# Altium PCB mini_backplane.PcbDoc (part 3 of 5)
Units mm, origin at the board's own origin, x right, y up, seen from the top; angles counter-clockwise.
Board outline 232.03 x 195 mm, 5 copper layers (Top Layer, MidLayer1, GND, POWER, Bottom Layer); 241 components, 200 nets, 1637 pads, 676 vias.
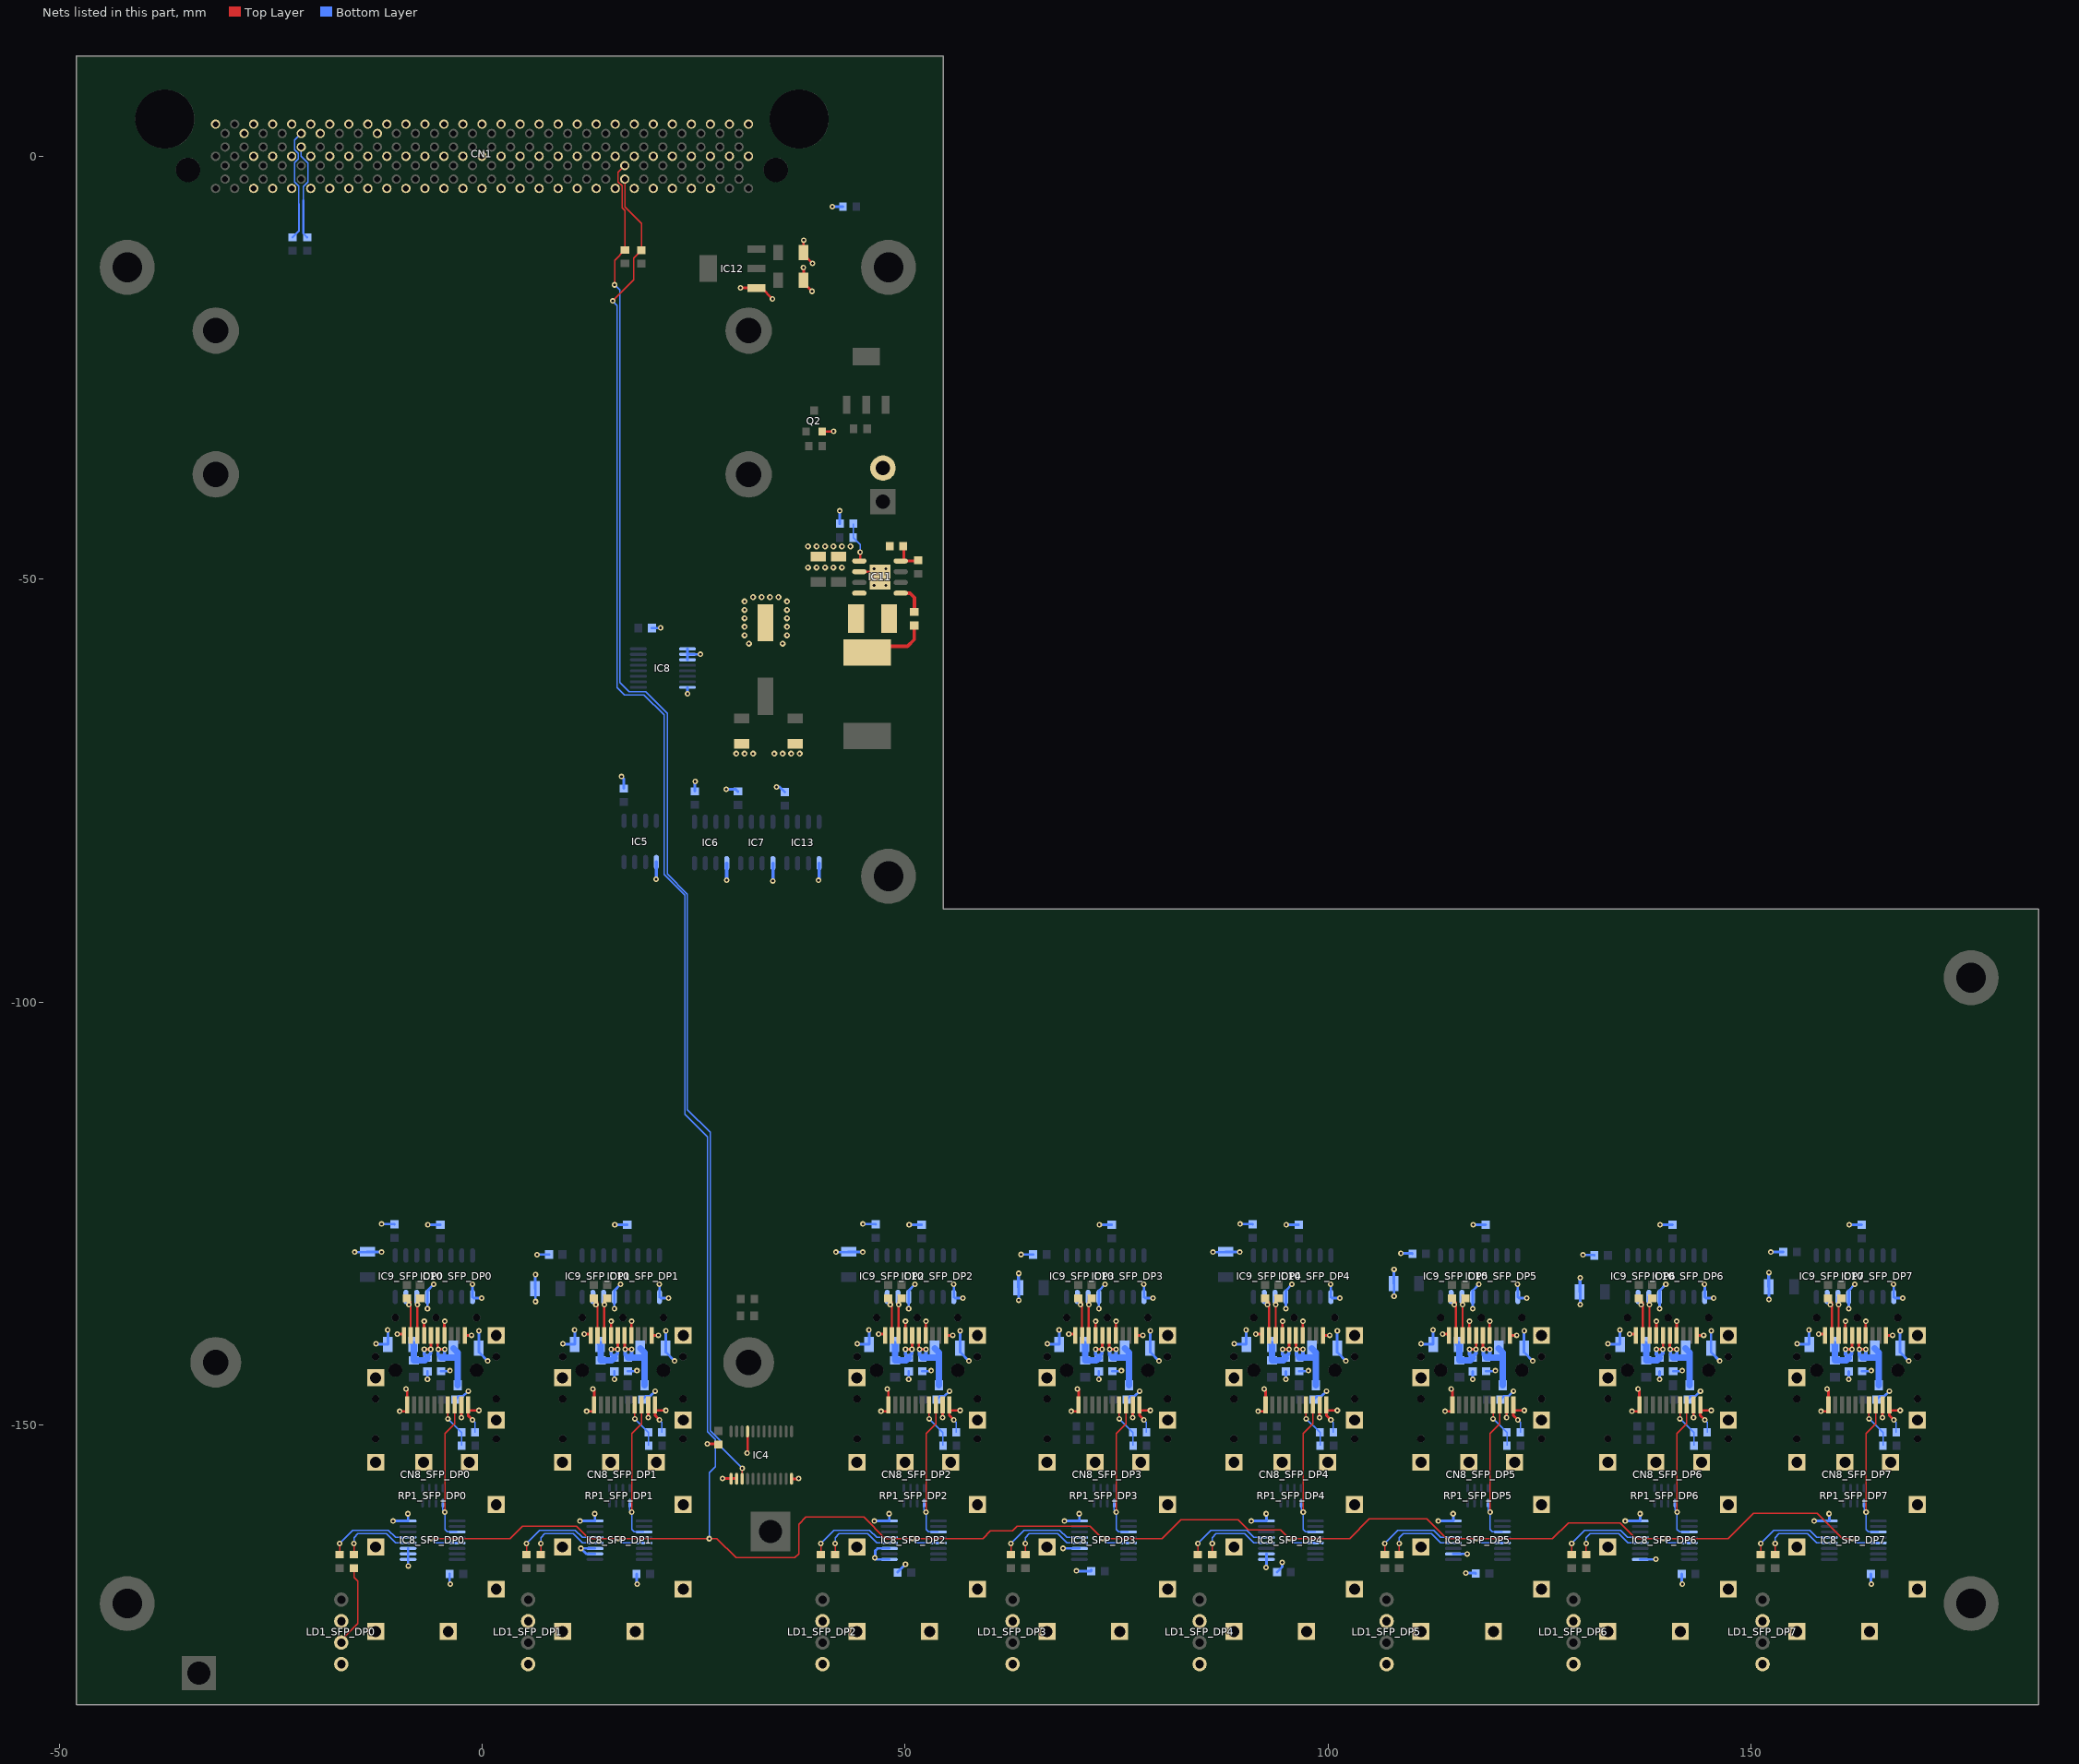
[diagram p5: the nets of this part, all layers, seen from the top]

## Via types
v1: diameter 0.66, hole 0.305, Top Layer to Bottom Layer, tented both sides, 576 vias
v2: diameter 0.711, hole 0.33, Top Layer to Bottom Layer, tented both sides, 97 vias
v3: diameter 0.66, hole 0.305, Top Layer to Bottom Layer, 3 vias

## Nets (pads, with @x,y where several pads share a name; then routed paths per layer and width w, separated by ;. In a path a pad name is that pad's centre, name@x,y a point inside that pad or via, vN(x,y) a via of type N, cw(c..) or ccw(c..) an arc to the next point about the centre after c; other vN are vias at no path point) (continued)
GND: C75.1 C76.1 C77.1 C78.1 C79_SFP_DP0.1 C79_SFP_DP1.1 C79_SFP_DP2.1 C79_SFP_DP3.1 C79_SFP_DP4.1 C79_SFP_DP5.1 C79_SFP_DP6.1 C79_SFP_DP7.1 C80_SFP_DP0.1 C80_SFP_DP1.1 C80_SFP_DP2.1 C80_SFP_DP3.1 C80_SFP_DP4.1 C80_SFP_DP5.1 C80_SFP_DP6.1 C80_SFP_DP7.1 C81_SFP_DP0.1 C81_SFP_DP1.1 C81_SFP_DP2.1 C81_SFP_DP3.1 C81_SFP_DP4.1 C81_SFP_DP5.1 C81_SFP_DP6.1 C81_SFP_DP7.1 C85.2 C86.1 C87.1 C88.1 C89.1 C90.1 C91.1 C92.1 C93.1 C117_SFP_DP0.2 C117_SFP_DP1.2 C117_SFP_DP2.2 C117_SFP_DP3.2 C117_SFP_DP4.2 C117_SFP_DP5.2 C117_SFP_DP6.2 C117_SFP_DP7.2 C118_SFP_DP0.2 C118_SFP_DP1.2 C118_SFP_DP2.2 C118_SFP_DP3.2 C118_SFP_DP4.2 C118_SFP_DP5.2 C118_SFP_DP6.2 C118_SFP_DP7.2 C120_SFP_DP0.1 C120_SFP_DP1.1 C120_SFP_DP2.1 C120_SFP_DP3.1 C120_SFP_DP4.1 C120_SFP_DP5.1 C120_SFP_DP6.1 C120_SFP_DP7.1 C121.1 C121_SFP_DP0.1 C121_SFP_DP1.1 C121_SFP_DP2.1 C121_SFP_DP3.1 C121_SFP_DP4.1 C121_SFP_DP5.1 C121_SFP_DP6.1 C121_SFP_DP7.1 C122_SFP_DP0.1 C122_SFP_DP1.1 C122_SFP_DP2.1 C122_SFP_DP3.1 C122_SFP_DP4.1 C122_SFP_DP5.1 C122_SFP_DP6.1 C122_SFP_DP7.1 C123_SFP_DP0.1 C123_SFP_DP1.1 C123_SFP_DP2.1 C123_SFP_DP3.1 C123_SFP_DP4.1 C123_SFP_DP5.1 C123_SFP_DP6.1 C123_SFP_DP7.1 CN1.1 CN1.5 CN1.7 CN1.10 CN1.13 CN1.16 CN1.17 CN1.19 CN1.22 CN1.25 CN1.26 CN1.28 CN1.31 CN1.34 CN1.37 CN1.40 CN1.43 CN1.46 CN1.49 CN1.52 CN1.55 CN1.58 CN1.61 CN1.64 CN1.67 CN1.70 CN1.73 CN1.76 CN1.79 CN1.82 CN1.85 CN1.86 CN1.89 CN1.92 CN1.92A CN1.95 CN1.95A CN1.98 CN1.98A CN1.101 CN1.101A CN1.104 CN1.104A CN1.107 CN1.107A CN1.110 CN1.110A CN1.113 CN1.113A CN1.116 CN1.116A CN1.119 CN1.119A CN1.122 CN1.122A CN1.125 CN1.125A CN1.128 CN1.128A CN1.131 CN1.131A CN1.134 CN1.134A CN1.137 CN1.137A CN1.140 CN1.140A CN1.143 CN1.143A CN1.146 CN1.146A CN1.149 CN1.149A CN1.152 CN1.152A CN1.155 CN1.155A CN1.158 CN1.158A CN1.161 CN1.161A CN1.164 CN1.164A CN2.2 CN8_SFP_DP0.1 CN8_SFP_DP0.9 CN8_SFP_DP0.10 CN8_SFP_DP0.11 CN8_SFP_DP0.14 CN8_SFP_DP0.17 CN8_SFP_DP0.20 CN8_SFP_DP0.21 CN8_SFP_DP0.22 CN8_SFP_DP0.23 CN8_SFP_DP0.24 CN8_SFP_DP0.25 CN8_SFP_DP0.26 CN8_SFP_DP0.27 CN8_SFP_DP0.28 CN8_SFP_DP0.29 CN8_SFP_DP0.30 CN8_SFP_DP0.31 CN8_SFP_DP1.1 CN8_SFP_DP1.9 CN8_SFP_DP1.10 CN8_SFP_DP1.11 CN8_SFP_DP1.14 CN8_SFP_DP1.17 CN8_SFP_DP1.20 CN8_SFP_DP1.21 CN8_SFP_DP1.22 CN8_SFP_DP1.23 CN8_SFP_DP1.24 CN8_SFP_DP1.25 CN8_SFP_DP1.26 CN8_SFP_DP1.27 CN8_SFP_DP1.28 CN8_SFP_DP1.29 CN8_SFP_DP1.30 CN8_SFP_DP1.31 CN8_SFP_DP2.1 CN8_SFP_DP2.9 CN8_SFP_DP2.10 CN8_SFP_DP2.11 CN8_SFP_DP2.14 CN8_SFP_DP2.17 CN8_SFP_DP2.20 CN8_SFP_DP2.21 CN8_SFP_DP2.22 CN8_SFP_DP2.23 CN8_SFP_DP2.24 CN8_SFP_DP2.25 CN8_SFP_DP2.26 CN8_SFP_DP2.27 CN8_SFP_DP2.28 CN8_SFP_DP2.29 CN8_SFP_DP2.30 CN8_SFP_DP2.31 CN8_SFP_DP3.1 CN8_SFP_DP3.9 CN8_SFP_DP3.10 CN8_SFP_DP3.11 CN8_SFP_DP3.14 CN8_SFP_DP3.17 CN8_SFP_DP3.20 CN8_SFP_DP3.21 CN8_SFP_DP3.22 CN8_SFP_DP3.23 CN8_SFP_DP3.24 CN8_SFP_DP3.25 CN8_SFP_DP3.26 CN8_SFP_DP3.27 CN8_SFP_DP3.28 CN8_SFP_DP3.29 CN8_SFP_DP3.30 CN8_SFP_DP3.31 CN8_SFP_DP4.1 CN8_SFP_DP4.9 CN8_SFP_DP4.10 CN8_SFP_DP4.11 CN8_SFP_DP4.14 CN8_SFP_DP4.17 CN8_SFP_DP4.20 CN8_SFP_DP4.21 CN8_SFP_DP4.22 CN8_SFP_DP4.23 CN8_SFP_DP4.24 CN8_SFP_DP4.25 CN8_SFP_DP4.26 CN8_SFP_DP4.27 CN8_SFP_DP4.28 CN8_SFP_DP4.29 CN8_SFP_DP4.30 CN8_SFP_DP4.31 CN8_SFP_DP5.1 CN8_SFP_DP5.9 CN8_SFP_DP5.10 CN8_SFP_DP5.11 CN8_SFP_DP5.14 CN8_SFP_DP5.17 CN8_SFP_DP5.20 CN8_SFP_DP5.21 CN8_SFP_DP5.22 CN8_SFP_DP5.23 CN8_SFP_DP5.24 CN8_SFP_DP5.25 CN8_SFP_DP5.26 CN8_SFP_DP5.27 CN8_SFP_DP5.28 CN8_SFP_DP5.29 CN8_SFP_DP5.30 CN8_SFP_DP5.31 CN8_SFP_DP6.1 CN8_SFP_DP6.9 CN8_SFP_DP6.10 CN8_SFP_DP6.11 CN8_SFP_DP6.14 CN8_SFP_DP6.17 CN8_SFP_DP6.20 CN8_SFP_DP6.21 CN8_SFP_DP6.22 CN8_SFP_DP6.23 CN8_SFP_DP6.24 CN8_SFP_DP6.25 CN8_SFP_DP6.26 CN8_SFP_DP6.27 CN8_SFP_DP6.28 CN8_SFP_DP6.29 CN8_SFP_DP6.30 CN8_SFP_DP6.31 CN8_SFP_DP7.1 CN8_SFP_DP7.9 CN8_SFP_DP7.10 CN8_SFP_DP7.11 CN8_SFP_DP7.14 CN8_SFP_DP7.17 CN8_SFP_DP7.20 CN8_SFP_DP7.21 CN8_SFP_DP7.22 CN8_SFP_DP7.23 CN8_SFP_DP7.24 CN8_SFP_DP7.25 CN8_SFP_DP7.26 CN8_SFP_DP7.27 CN8_SFP_DP7.28 CN8_SFP_DP7.29 CN8_SFP_DP7.30 CN8_SFP_DP7.31 D1.1 IC4.1 IC4.2 IC4.12 IC4.21 IC5.1 IC6.1 IC7.1 IC8.1 IC8.2 IC8.3 IC8.8 IC8_SFP_DP0.1 IC8_SFP_DP0.2 IC8_SFP_DP0.3 IC8_SFP_DP0.8 IC8_SFP_DP1.2 IC8_SFP_DP1.3 IC8_SFP_DP1.8 IC8_SFP_DP2.1 IC8_SFP_DP2.3 IC8_SFP_DP2.8 IC8_SFP_DP3.3 IC8_SFP_DP3.8 IC8_SFP_DP4.1 IC8_SFP_DP4.2 IC8_SFP_DP4.8 IC8_SFP_DP5.2 IC8_SFP_DP5.8 IC8_SFP_DP6.1 IC8_SFP_DP6.8 IC8_SFP_DP7.8 IC9_SFP_DP0.1 IC9_SFP_DP1.1 IC9_SFP_DP2.1 IC9_SFP_DP3.1 IC9_SFP_DP4.1 IC9_SFP_DP5.1 IC9_SFP_DP6.1 IC9_SFP_DP7.1 IC10_SFP_DP0.1 IC10_SFP_DP1.1 IC10_SFP_DP2.1 IC10_SFP_DP3.1 IC10_SFP_DP4.1 IC10_SFP_DP5.1 IC10_SFP_DP6.1 IC10_SFP_DP7.1 IC11.6 IC11.PAD IC12.1 IC13.1 LD1_SFP_DP0.1 LD1_SFP_DP0.3 LD1_SFP_DP1.1 LD1_SFP_DP1.3 LD1_SFP_DP2.1 LD1_SFP_DP2.3 LD1_SFP_DP3.1 LD1_SFP_DP3.3 LD1_SFP_DP4.1 LD1_SFP_DP4.3 LD1_SFP_DP5.1 LD1_SFP_DP5.3 LD1_SFP_DP6.1 LD1_SFP_DP6.3 LD1_SFP_DP7.1 LD1_SFP_DP7.3 Q2.2 R12.2 R70_SFP_DP0.1 R70_SFP_DP1.1 R70_SFP_DP2.1 R70_SFP_DP3.1 R70_SFP_DP4.1 R70_SFP_DP5.1 R70_SFP_DP6.1 R70_SFP_DP7.1 R77.1 | length 416.9
  Top Layer w0.305: v1(-10.008,-139.283) -9.4,-139.283 CN8_SFP_DP0.20@-9.243,-139.44 ; v1(-9.729,-148.402) -8.916,-148.402 -8.843,-148.33 CN8_SFP_DP0.1@-8.843,-147.64 -8.843,-145.782 -8.865,-145.76 v1(-8.992,-145.76) ; CN8_SFP_DP0.17@-6.843,-139.44 -6.843,-137.77 v1(-6.833,-137.759) ; CN8_SFP_DP0.14@-4.443,-139.44 -4.443,-137.783 v1(-4.42,-137.759) ; v1(-2.443,-149.134) CN8_SFP_DP0.9@-2.443,-147.64 ; CN8_SFP_DP0.11@-2.043,-139.44 -1.274,-139.44 v1(-1.245,-139.41) ; v1(-1.118,-149.418) -1.643,-148.893 CN8_SFP_DP0.10@-1.643,-147.64 -1.643,-148.3 v1(-0.356,-148.3) ; v1(12.09,-139.283) 12.698,-139.283 CN8_SFP_DP1.20@12.855,-139.44 ; v1(12.369,-148.402) 13.182,-148.402 13.255,-148.33 CN8_SFP_DP1.1@13.255,-147.64 13.255,-145.782 13.233,-145.76 v1(13.106,-145.76) ; CN8_SFP_DP1.17@15.255,-139.44 15.255,-137.77 v1(15.265,-137.759) ; CN8_SFP_DP1.14@17.655,-139.44 17.655,-137.783 v1(17.678,-137.759) ; v1(19.655,-149.134) CN8_SFP_DP1.9@19.655,-147.64 ; CN8_SFP_DP1.11@20.055,-139.44 20.824,-139.44 v1(20.853,-139.41) ; v1(20.98,-149.418) 20.455,-148.893 CN8_SFP_DP1.10@20.455,-147.64 20.455,-148.3 v1(21.742,-148.3) ; v1(26.644,-152.263) 27.876,-152.263 C75.1@27.94,-152.326 ; v1(28.448,-156.352) 30.063,-156.352 IC4.2@30.095,-156.384 ; v1(30.556,-15.56) 30.57,-15.574 IC12.1@32.441,-15.574 33.059,-15.574 v1(34.34,-16.855) ; v1(31.343,-153.33) 31.395,-153.278 IC4.21@31.395,-150.784 31.395,-152.008 ; IC4.12@36.595,-156.384 37.408,-156.384 v1(37.439,-156.352) ; v1(37.998,-13.172) 38.025,-13.199 C89.1@38.025,-14.671 38.025,-14.977 v1(39.014,-15.966) ; v1(38.023,-9.921) 37.999,-9.945 C86.1@37.999,-11.369 37.999,-11.599 v1(39.065,-12.664) ; Q2.2@40.218,-32.558 41.523,-32.558 v1(41.554,-32.527) ; IC11.6@44.602,-49.123 46.417,-49.123 IC11.PAD@47.052,-49.758 ; v1(46.888,-139.283) 47.496,-139.283 CN8_SFP_DP2.20@47.653,-139.44 ; v1(47.167,-148.402) 47.98,-148.402 48.053,-148.33 CN8_SFP_DP2.1@48.053,-147.64 48.053,-145.782 48.031,-145.76 v1(47.904,-145.76) ; CN8_SFP_DP2.17@50.053,-139.44 50.053,-137.77 v1(50.063,-137.759) ; CN8_SFP_DP2.14@52.453,-139.44 52.453,-137.783 v1(52.476,-137.759) ; v1(54.453,-149.134) CN8_SFP_DP2.9@54.453,-147.64 ; CN8_SFP_DP2.11@54.853,-139.44 55.622,-139.44 v1(55.651,-139.41) ; v1(55.778,-149.418) 55.253,-148.893 CN8_SFP_DP2.10@55.253,-147.64 55.253,-148.3 v1(56.54,-148.3) ; v1(69.367,-139.283) 69.975,-139.283 CN8_SFP_DP3.20@70.132,-139.44 ; v1(69.646,-148.402) 70.459,-148.402 70.532,-148.33 CN8_SFP_DP3.1@70.532,-147.64 70.532,-145.782 70.51,-145.76 v1(70.383,-145.76) ; CN8_SFP_DP3.17@72.532,-139.44 72.532,-137.77 v1(72.542,-137.759) ; CN8_SFP_DP3.14@74.932,-139.44 74.932,-137.783 v1(74.955,-137.759) ; v1(76.932,-149.134) CN8_SFP_DP3.9@76.932,-147.64 ; CN8_SFP_DP3.11@77.332,-139.44 78.101,-139.44 v1(78.13,-139.41) ; v1(78.257,-149.418) 77.732,-148.893 CN8_SFP_DP3.10@77.732,-147.64 77.732,-148.3 v1(79.019,-148.3) ; v1(91.465,-139.283) 92.073,-139.283 CN8_SFP_DP4.20@92.23,-139.44 ; v1(91.744,-148.402) 92.557,-148.402 92.63,-148.33 CN8_SFP_DP4.1@92.63,-147.64 92.63,-145.782 92.608,-145.76 v1(92.481,-145.76) ; CN8_SFP_DP4.17@94.63,-139.44 94.63,-137.77 v1(94.64,-137.759) ; CN8_SFP_DP4.14@97.03,-139.44 97.03,-137.783 v1(97.053,-137.759) ; v1(99.03,-149.134) CN8_SFP_DP4.9@99.03,-147.64 ; CN8_SFP_DP4.11@99.43,-139.44 100.199,-139.44 v1(100.228,-139.41) ; v1(100.355,-149.418) 99.83,-148.893 CN8_SFP_DP4.10@99.83,-147.64 99.83,-148.3 v1(101.117,-148.3) ; v1(113.563,-139.283) 114.171,-139.283 CN8_SFP_DP5.20@114.328,-139.44 ; v1(113.842,-148.402) 114.655,-148.402 114.728,-148.33 CN8_SFP_DP5.1@114.728,-147.64 114.728,-145.782 114.706,-145.76 v1(114.579,-145.76) ; CN8_SFP_DP5.17@116.728,-139.44 116.728,-137.77 v1(116.738,-137.759) ; CN8_SFP_DP5.14@119.128,-139.44 119.128,-137.783 v1(119.151,-137.759) ; v1(121.128,-149.134) CN8_SFP_DP5.9@121.128,-147.64 ; CN8_SFP_DP5.11@121.528,-139.44 122.297,-139.44 v1(122.326,-139.41) ; v1(122.453,-149.418) 121.928,-148.893 CN8_SFP_DP5.10@121.928,-147.64 121.928,-148.3 v1(123.215,-148.3) ; v1(135.661,-139.283) 136.269,-139.283 CN8_SFP_DP6.20@136.426,-139.44 ; v1(135.94,-148.402) 136.753,-148.402 136.826,-148.33 CN8_SFP_DP6.1@136.826,-147.64 136.826,-145.782 136.804,-145.76 v1(136.677,-145.76) ; CN8_SFP_DP6.17@138.826,-139.44 138.826,-137.77 v1(138.836,-137.759) ; CN8_SFP_DP6.14@141.226,-139.44 141.226,-137.783 v1(141.249,-137.759) ; v1(143.226,-149.134) CN8_SFP_DP6.9@143.226,-147.64 ; CN8_SFP_DP6.11@143.626,-139.44 144.395,-139.44 v1(144.424,-139.41) ; v1(144.551,-149.418) 144.026,-148.893 CN8_SFP_DP6.10@144.026,-147.64 144.026,-148.3 v1(145.313,-148.3) ; v1(158.013,-139.283) 158.621,-139.283 CN8_SFP_DP7.20@158.778,-139.44 ; v1(158.292,-148.402) 159.105,-148.402 159.178,-148.33 CN8_SFP_DP7.1@159.178,-147.64 159.178,-145.782 159.156,-145.76 v1(159.029,-145.76) ; CN8_SFP_DP7.17@161.178,-139.44 161.178,-137.77 v1(161.188,-137.759) ; CN8_SFP_DP7.14@163.578,-139.44 163.578,-137.783 v1(163.601,-137.759) ; v1(165.578,-149.134) CN8_SFP_DP7.9@165.578,-147.64 ; CN8_SFP_DP7.11@165.978,-139.44 166.747,-139.44 v1(166.776,-139.41) ; v1(166.903,-149.418) 166.378,-148.893 CN8_SFP_DP7.10@166.378,-147.64 166.378,-148.3 v1(167.665,-148.3)
  Bottom Layer w0.152: v1(-1.118,-149.418) -0.826,-149.71 R70_SFP_DP0.1@-0.826,-150.891 ; v1(20.98,-149.418) 21.272,-149.71 R70_SFP_DP1.1@21.272,-150.891 ; v1(55.778,-149.418) 56.07,-149.71 R70_SFP_DP2.1@56.07,-150.891 ; v1(78.257,-149.418) 78.549,-149.71 R70_SFP_DP3.1@78.549,-150.891 ; v1(100.355,-149.418) 100.647,-149.71 R70_SFP_DP4.1@100.647,-150.891 ; v1(122.453,-149.418) 122.745,-149.71 R70_SFP_DP5.1@122.745,-150.891 ; v1(144.551,-149.418) 144.843,-149.71 R70_SFP_DP6.1@144.843,-150.891 ; v1(166.903,-149.418) 167.195,-149.71 R70_SFP_DP7.1@167.195,-150.891
  Bottom Layer w0.305: v1(-15.063,-129.581) v1(-11.888,-129.581) -11.94,-129.528 C122_SFP_DP0.1@-13.564,-129.528 ; v1(-12.548,-140.426) -12.497,-140.477 C120_SFP_DP0.1@-11.127,-140.477 -11.127,-138.799 v1(-11.151,-138.775) ; v1(-11.862,-126.253) -10.402,-126.253 C80_SFP_DP0.1@-10.364,-126.291 ; v1(-10.516,-161.381) -10.502,-161.367 IC8_SFP_DP0.8@-8.742,-161.367 -8.742,-160.539 v1(-8.763,-160.518) ; IC8_SFP_DP0.3@-8.742,-164.617 -8.742,-166.66 v3(-8.713,-166.69) ; v1(-6.452,-144.617) C79_SFP_DP0.1@-6.452,-143.69 ; v1(-6.452,-136.261) IC9_SFP_DP0.1@-6.452,-134.875 -6.452,-134.127 v1(-5.715,-133.391) ; v1(-6.401,-126.355) -6.389,-126.342 C81_SFP_DP0.1@-4.928,-126.342 ; C118_SFP_DP0.2@-4.852,-143.665 -3.848,-143.665 v1(-3.785,-143.601) ; C121_SFP_DP0.1@-3.823,-167.63 -3.823,-168.76 v1(-3.76,-168.824) ; C123_SFP_DP0.1@-3.163,-147.03 -2.782,-146.649 -2.261,-146.649 v1(-1.626,-146.014) ; v1(-1.143,-133.391) -1.118,-133.416 IC10_SFP_DP0.1@-1.118,-134.875 -0.977,-135.016 v1(-0.051,-135.016) ; v1(-0.356,-138.902) -0.483,-138.902 -0.38,-139.005 C117_SFP_DP0.2@-0.38,-140.96 -0.38,-141.418 v1(0.66,-142.458) ; C122_SFP_DP1.1@6.272,-133.924 6.272,-132.3 v1(6.324,-132.248) v1(6.324,-135.423) ; v1(6.502,-129.885) 6.527,-129.86 C80_SFP_DP1.1@7.912,-129.86 ; v1(9.55,-140.426) 9.601,-140.477 C120_SFP_DP1.1@10.971,-140.477 10.971,-138.799 v1(10.947,-138.775) ; v1(11.582,-161.381) 11.596,-161.367 IC8_SFP_DP1.8@13.356,-161.367 13.356,-160.539 v1(13.335,-160.518) ; v3(11.684,-164.607) v3@11.693,-164.617 ; IC8_SFP_DP1.2@13.356,-165.267 12.343,-165.267 v3@11.693,-164.617 ; IC8_SFP_DP1.3@13.356,-164.617 v3@11.693,-164.617 ; v1(15.646,-144.617) C79_SFP_DP1.1@15.646,-143.69 ; v1(15.646,-136.261) IC9_SFP_DP1.1@15.646,-134.875 15.646,-134.127 v1(16.383,-133.391) ; v1(15.697,-126.355) 15.709,-126.342 C81_SFP_DP1.1@17.17,-126.342 ; v1(16.484,-73.345) 16.764,-73.624 C77.1@16.764,-74.755 ; C118_SFP_DP1.2@17.246,-143.665 18.25,-143.665 v1(18.313,-143.601) ; C121_SFP_DP1.1@18.275,-167.63 18.275,-168.76 v1(18.338,-168.824) ; C123_SFP_DP1.1@18.935,-147.03 19.316,-146.649 19.837,-146.649 v1(20.472,-146.014) ; C121.1@20.078,-55.794 21.082,-55.794 v1(21.107,-55.768) ; v1(20.955,-133.391) 20.98,-133.416 IC10_SFP_DP1.1@20.98,-134.875 21.121,-135.016 v1(22.047,-135.016) ; v1(21.742,-138.902) 21.615,-138.902 21.718,-139.005 C117_SFP_DP1.2@21.718,-140.96 21.718,-141.418 v1(22.758,-142.458) ; IC8.8@24.286,-62.793 24.286,-63.545 v1(24.307,-63.566) ; IC8.3@24.286,-59.543 IC8.2@24.286,-58.893 ; IC8.1@24.286,-58.243 IC8.2@24.286,-58.893 ; C90.1@25.171,-75.085 25.171,-73.955 v1(25.196,-73.929) ; v1(25.806,-58.892) IC8.2@24.286,-58.893 ; v1(28.854,-74.844) 29.984,-74.844 C76.1@30.251,-75.11 ; v1(34.823,-74.564) 35.166,-74.564 C78.1@35.788,-75.187 ; v1(41.402,-5.959) R12.2@42.659,-5.959 ; v1(41.833,-129.581) v1(45.008,-129.581) 44.956,-129.528 C122_SFP_DP2.1@43.332,-129.528 ; v1(42.291,-41.925) 42.303,-41.938 C91.1@42.303,-43.449 ; v1(44.348,-140.426) 44.399,-140.477 C120_SFP_DP2.1@45.769,-140.477 45.769,-138.799 v1(45.745,-138.775) ; v1(45.034,-126.253) 46.494,-126.253 C80_SFP_DP2.1@46.532,-126.291 ; v1(46.38,-161.381) 46.394,-161.367 IC8_SFP_DP2.8@48.154,-161.367 48.154,-160.539 v1(48.133,-160.518) ; IC8_SFP_DP2.1@48.154,-165.917 46.623,-165.917 v1(46.431,-165.725) 46.482,-165.674 46.482,-164.887 46.751,-164.617 IC8_SFP_DP2.3@48.154,-164.617 ; C121_SFP_DP2.1@49.136,-167.414 v1(50.063,-166.487) ; v1(50.444,-144.617) C79_SFP_DP2.1@50.444,-143.69 ; v1(50.444,-136.261) IC9_SFP_DP2.1@50.444,-134.875 50.444,-134.127 v1(51.181,-133.391) ; v1(50.495,-126.355) 50.507,-126.342 C81_SFP_DP2.1@51.968,-126.342 ; C118_SFP_DP2.2@52.044,-143.665 53.048,-143.665 v1(53.111,-143.601) ; C123_SFP_DP2.1@53.733,-147.03 54.114,-146.649 54.635,-146.649 v1(55.27,-146.014) ; v1(55.753,-133.391) 55.778,-133.416 IC10_SFP_DP2.1@55.778,-134.875 55.919,-135.016 v1(56.845,-135.016) ; v1(56.54,-138.902) 56.413,-138.902 56.516,-139.005 C117_SFP_DP2.2@56.516,-140.96 56.516,-141.418 v1(57.556,-142.458) ; C122_SFP_DP3.1@63.397,-133.772 63.397,-132.147 v1(63.449,-132.095) v1(63.449,-135.27) ; v1(63.728,-129.86) C80_SFP_DP3.1@65.138,-129.86 ; v1(66.827,-140.426) 66.878,-140.477 C120_SFP_DP3.1@68.248,-140.477 68.248,-138.799 v1(68.224,-138.775) ; v1(68.681,-164.607) 70.623,-164.607 IC8_SFP_DP3.3@70.633,-164.617 ; v1(68.859,-161.381) 68.873,-161.367 IC8_SFP_DP3.8@70.633,-161.367 70.633,-160.539 v1(70.612,-160.518) ; v1(70.256,-167.274) 70.281,-167.3 C121_SFP_DP3.1@72.021,-167.3 C121_SFP_DP3.1@72.021,-167.134 ; v1(72.923,-144.617) C79_SFP_DP3.1@72.923,-143.69 ; v1(72.923,-136.261) IC9_SFP_DP3.1@72.923,-134.875 72.923,-134.127 v1(73.66,-133.391) ; v1(72.974,-126.355) 72.986,-126.342 C81_SFP_DP3.1@74.447,-126.342 ; C118_SFP_DP3.2@74.523,-143.665 75.527,-143.665 v1(75.59,-143.601) ; C123_SFP_DP3.1@76.212,-147.03 76.593,-146.649 77.114,-146.649 v1(77.749,-146.014) ; v1(78.232,-133.391) 78.257,-133.416 IC10_SFP_DP3.1@78.257,-134.875 78.398,-135.016 v1(79.324,-135.016) ; v1(79.019,-138.902) 78.892,-138.902 78.995,-139.005 C117_SFP_DP3.2@78.995,-140.96 78.995,-141.418 v1(80.035,-142.458) ; v1(86.41,-129.581) v1(89.585,-129.581) 89.533,-129.528 C122_SFP_DP4.1@87.909,-129.528 ; v1(88.925,-140.426) 88.976,-140.477 C120_SFP_DP4.1@90.346,-140.477 90.346,-138.799 v1(90.322,-138.775) ; v1(89.611,-126.253) 91.071,-126.253 C80_SFP_DP4.1@91.109,-126.291 ; v1(90.957,-161.381) 90.971,-161.367 IC8_SFP_DP4.8@92.731,-161.367 92.731,-160.539 v1(92.71,-160.518) ; v1(92.684,-166.868) 92.731,-166.821 IC8_SFP_DP4.1@92.731,-165.917 IC8_SFP_DP4.2@92.731,-165.267 ; C121_SFP_DP4.1@93.992,-167.401 94.589,-166.804 v1(94.589,-166.284) ; v1(95.021,-144.617) C79_SFP_DP4.1@95.021,-143.69 ; v1(95.021,-136.261) IC9_SFP_DP4.1@95.021,-134.875 95.021,-134.127 v1(95.758,-133.391) ; v1(95.072,-126.355) 95.084,-126.342 C81_SFP_DP4.1@96.545,-126.342 ; C118_SFP_DP4.2@96.621,-143.665 97.625,-143.665 v1(97.688,-143.601) ; C123_SFP_DP4.1@98.31,-147.03 98.691,-146.649 99.212,-146.649 v1(99.847,-146.014) ; v1(100.33,-133.391) 100.355,-133.416 IC10_SFP_DP4.1@100.355,-134.875 100.496,-135.016 v1(101.422,-135.016) ; v1(101.117,-138.902) 100.99,-138.902 101.093,-139.005 C117_SFP_DP4.2@101.093,-140.96 101.093,-141.418 v1(102.133,-142.458) ; C122_SFP_DP5.1@107.77,-133.289 107.77,-131.665 v1(107.823,-131.613) v1(107.823,-134.788) ; v1(108.635,-129.733) 109.944,-129.733 C80_SFP_DP5.1@109.994,-129.784 ; v1(111.023,-140.426) 111.074,-140.477 C120_SFP_DP5.1@112.444,-140.477 112.444,-138.799 v1(112.42,-138.775) ; v1(113.055,-161.381) 113.069,-161.367 IC8_SFP_DP5.8@114.829,-161.367 114.829,-160.539 v1(114.808,-160.518) ; IC8_SFP_DP5.2@114.829,-165.267 v1(116.484,-165.268) ; v1(116.306,-167.528) 117.437,-167.528 C121_SFP_DP5.1@117.487,-167.579 ; v1(117.119,-144.617) C79_SFP_DP5.1@117.119,-143.69 ; v1(117.119,-136.261) IC9_SFP_DP5.1@117.119,-134.875 117.119,-134.127 v1(117.856,-133.391) ; v1(117.17,-126.355) 117.182,-126.342 C81_SFP_DP5.1@118.643,-126.342 ; C118_SFP_DP5.2@118.719,-143.665 119.723,-143.665 v1(119.786,-143.601) ; C123_SFP_DP5.1@120.408,-147.03 120.789,-146.649 121.31,-146.649 v1(121.945,-146.014) ; v1(122.428,-133.391) 122.453,-133.416 IC10_SFP_DP5.1@122.453,-134.875 122.594,-135.016 v1(123.52,-135.016) ; v1(123.215,-138.902) 123.088,-138.902 123.191,-139.005 C117_SFP_DP5.2@123.191,-140.96 123.191,-141.418 v1(124.231,-142.458) ; C122_SFP_DP6.1@129.767,-134.28 129.767,-132.655 v1(129.819,-132.603) v1(129.819,-135.778) ; v1(130.149,-129.911) 131.457,-129.911 C80_SFP_DP6.1@131.508,-129.962 ; v1(133.121,-140.426) 133.172,-140.477 C120_SFP_DP6.1@134.542,-140.477 134.542,-138.799 v1(134.518,-138.775) ; v1(135.153,-161.381) 135.167,-161.367 IC8_SFP_DP6.8@136.927,-161.367 136.927,-160.539 v1(136.906,-160.518) ; IC8_SFP_DP6.1@136.927,-165.917 138.771,-165.917 v1(138.785,-165.903) ; v1(139.217,-144.617) C79_SFP_DP6.1@139.217,-143.69 ; v1(139.217,-136.261) IC9_SFP_DP6.1@139.217,-134.875 139.217,-134.127 v1(139.954,-133.391) ; v1(139.268,-126.355) 139.28,-126.342 C81_SFP_DP6.1@140.741,-126.342 ; C118_SFP_DP6.2@140.817,-143.665 141.821,-143.665 v1(141.884,-143.601) ; C121_SFP_DP6.1@141.846,-167.63 141.846,-168.76 v1(141.909,-168.824) ; C123_SFP_DP6.1@142.506,-147.03 142.887,-146.649 143.408,-146.649 v1(144.043,-146.014) ; v1(144.526,-133.391) 144.551,-133.416 IC10_SFP_DP6.1@144.551,-134.875 144.692,-135.016 v1(145.618,-135.016) ; v1(145.313,-138.902) 145.186,-138.902 145.289,-139.005 C117_SFP_DP6.2@145.289,-140.96 145.289,-141.418 v1(146.329,-142.458) ; C122_SFP_DP7.1@152.093,-133.67 152.093,-132.046 v1(152.146,-131.994) v1(152.146,-135.169) ; v1(152.349,-129.581) 152.374,-129.555 C80_SFP_DP7.1@153.835,-129.555 ; v1(155.473,-140.426) 155.524,-140.477 C120_SFP_DP7.1@156.894,-140.477 156.894,-138.799 v1(156.87,-138.775) ; v1(157.505,-161.381) 157.519,-161.367 IC8_SFP_DP7.8@159.279,-161.367 159.279,-160.539 v1(159.258,-160.518) ; v1(161.569,-144.617) C79_SFP_DP7.1@161.569,-143.69 ; v1(161.569,-136.261) IC9_SFP_DP7.1@161.569,-134.875 161.569,-134.127 v1(162.306,-133.391) ; v1(161.62,-126.355) 161.632,-126.342 C81_SFP_DP7.1@163.093,-126.342 ; C118_SFP_DP7.2@163.169,-143.665 164.173,-143.665 v1(164.236,-143.601) ; C121_SFP_DP7.1@164.198,-167.63 164.198,-168.76 v1(164.261,-168.824) ; C123_SFP_DP7.1@164.858,-147.03 165.239,-146.649 165.76,-146.649 v1(166.395,-146.014) ; v1(166.878,-133.391) 166.903,-133.416 IC10_SFP_DP7.1@166.903,-134.875 167.044,-135.016 v1(167.97,-135.016) ; v1(167.665,-138.902) 167.538,-138.902 167.641,-139.005 C117_SFP_DP7.2@167.641,-140.96 167.641,-141.418 v1(168.681,-142.458)
  Bottom Layer w0.406: v1(20.574,-85.486) 20.599,-85.461 IC5.1@20.599,-83.466 ; v1(28.93,-85.588) IC6.1@28.93,-83.593 ; v1(34.391,-85.689) IC7.1@34.391,-83.593 ; v1(39.776,-85.613) 39.852,-85.537 IC13.1@39.852,-83.593
  other v2: 30.048,-70.633 31.048,-70.633 32.048,-70.633 34.548,-70.633 35.548,-70.633 36.548,-70.633 37.548,-70.633 31.548,-57.633 35.548,-57.633 31.048,-56.633 36.048,-56.633 31.048,-55.633 36.048,-55.633 31.048,-54.633 36.048,-54.633 31.048,-53.633 36.048,-53.633 31.048,-52.633 36.048,-52.633 32.048,-52.133 33.048,-52.133 34.048,-52.133 35.048,-52.133 46.352,-50.758 47.752,-50.758 46.352,-48.758 47.752,-48.758 38.548,-48.633 39.548,-48.633 40.548,-48.633 41.548,-48.633 42.548,-48.633 38.548,-46.133 39.548,-46.133 40.548,-46.133 41.548,-46.133 42.548,-46.133 43.548,-46.133
I2C_IRQ: CN1.105 IC8_SFP_DP0.13 IC8_SFP_DP1.13 IC8_SFP_DP2.13 IC8_SFP_DP3.13 IC8_SFP_DP4.13 IC8_SFP_DP5.13 IC8_SFP_DP6.13 IC8_SFP_DP7.13 R1.1 | length 380.9
  Top Layer w0.152: v1(-6.02,-163.464) 3.327,-163.464 4.8,-161.991 11.176,-161.991 12.649,-163.464 v1(16.078,-163.464) v1(26.873,-163.464) 27.762,-163.464 30.022,-165.725 36.982,-165.725 37.465,-165.242 37.465,-161.762 38.303,-160.924 45.133,-160.924 47.673,-163.464 v1(50.876,-163.464) 59.207,-163.464 60.121,-162.55 62.712,-162.55 63.271,-161.991 71.882,-161.991 v1(73.355,-163.464) 80.391,-163.464 82.651,-161.204 89.382,-161.204 90.601,-162.423 94.411,-162.423 v1(95.453,-163.464) 102.565,-163.464 104.902,-161.127 111.709,-161.127 114.046,-163.464 v1(117.551,-163.464) 126.542,-163.464 128.422,-161.585 134.566,-161.585 136.42,-163.439 139.623,-163.439 v1(139.649,-163.464) 147.294,-163.464 150.317,-160.442 157.835,-160.442 160.858,-163.464 v1(162.001,-163.464) ; v1(15.443,-17.109) 17.932,-14.62 17.932,-12.017 R1.1@18.846,-11.102 18.846,-7.94 18.465,-7.559 ; CN1.105@16.875,-2.7 16.875,-5.968 18.465,-7.559 ; 18.516,-7.61 18.465,-7.559
  Bottom Layer w0.152: v1(-6.02,-163.464) -5.517,-163.967 IC8_SFP_DP0.13@-2.942,-163.967 ; v1(15.443,-17.109) 15.976,-17.643 15.976,-18.532 ; 15.976,-18.075 15.976,-18.532 ; v1(16.078,-163.464) 16.581,-163.967 IC8_SFP_DP1.13@19.156,-163.967 ; v1(26.873,-163.464) 26.873,-155.666 27.609,-154.93 27.609,-151.754 26.67,-150.814 26.67,-115.966 23.982,-113.279 23.982,-87.371 21.513,-84.902 21.513,-66.055 19.151,-63.693 16.84,-63.693 15.976,-62.829 15.976,-18.532 ; v1(50.876,-163.464) 51.379,-163.967 IC8_SFP_DP2.13@53.954,-163.967 ; v1(73.355,-163.464) 73.858,-163.967 IC8_SFP_DP3.13@76.433,-163.967 ; v1(95.453,-163.464) 95.956,-163.967 IC8_SFP_DP4.13@98.531,-163.967 ; v1(117.551,-163.464) 118.054,-163.967 IC8_SFP_DP5.13@120.629,-163.967 ; v1(139.649,-163.464) 140.152,-163.967 IC8_SFP_DP6.13@142.727,-163.967 ; v1(162.001,-163.464) 162.504,-163.967 IC8_SFP_DP7.13@165.079,-163.967
I2C_NRST: CN1.106 IC4.3 R2.1 | length 164.2
  Top Layer w0.152: v1(15.671,-15.204) 15.671,-12.296 R2.1@16.891,-11.077 16.891,-6.415 16.57,-6.094 16.57,-3.496 16.096,-3.022 16.096,-1.878 CN1.106@16.875,-1.1 ; IC4.3@30.745,-156.384 30.745,-155.147 v1(30.759,-155.133)
  Bottom Layer w0.152: v1(15.671,-15.204) 16.281,-15.814 16.281,-18.583 ; 16.281,-18.202 16.281,-18.583 ; v1(30.759,-155.133) 28.244,-152.618 28.244,-151.958 26.974,-150.688 26.974,-115.433 24.287,-112.745 24.287,-87.244 21.92,-84.877 21.92,-65.903 19.329,-63.312 17.373,-63.312 16.281,-62.22 16.281,-18.583
LED_LINK_SFP_DP0: IC8_SFP_DP0.4 R9_SFP_DP0.1 | length 9.1
  Top Layer w0.152: R9_SFP_DP0.1@-15.139,-165.357 v1(-15.139,-164.023)
  Bottom Layer w0.152: v1(-15.139,-164.023) -15.139,-163.337 -14.682,-162.88 -11.303,-162.88 -10.211,-163.972 -8.748,-163.972 IC8_SFP_DP0.4@-8.742,-163.967
LED_LINK_SFP_DP1: IC8_SFP_DP1.4 R9_SFP_DP1.1 | length 9.1
  Top Layer w0.152: R9_SFP_DP1.1@6.959,-165.357 v1(6.959,-164.023)
  Bottom Layer w0.152: v1(6.959,-164.023) 6.959,-163.337 7.416,-162.88 10.795,-162.88 11.887,-163.972 13.35,-163.972 IC8_SFP_DP1.4@13.356,-163.967
LED_LINK_SFP_DP2: IC8_SFP_DP2.4 R9_SFP_DP2.1 | length 9.1
  Top Layer w0.152: R9_SFP_DP2.1@41.757,-165.357 v1(41.757,-164.023)
  Bottom Layer w0.152: v1(41.757,-164.023) 41.757,-163.337 42.214,-162.88 45.593,-162.88 46.685,-163.972 48.148,-163.972 IC8_SFP_DP2.4@48.154,-163.967
LED_LINK_SFP_DP3: IC8_SFP_DP3.4 R9_SFP_DP3.1 | length 9.1
  Top Layer w0.152: R9_SFP_DP3.1@64.236,-165.357 v1(64.236,-164.023)
  Bottom Layer w0.152: v1(64.236,-164.023) 64.236,-163.337 64.693,-162.88 68.072,-162.88 69.164,-163.972 70.627,-163.972 IC8_SFP_DP3.4@70.633,-163.967
LED_LINK_SFP_DP4: IC8_SFP_DP4.4 R9_SFP_DP4.1 | length 9.1
  Top Layer w0.152: R9_SFP_DP4.1@86.334,-165.357 v1(86.334,-164.023)
  Bottom Layer w0.152: v1(86.334,-164.023) 86.334,-163.337 86.791,-162.88 90.17,-162.88 91.262,-163.972 92.725,-163.972 IC8_SFP_DP4.4@92.731,-163.967
LED_LINK_SFP_DP5: IC8_SFP_DP5.4 R9_SFP_DP5.1 | length 9.1
  Top Layer w0.152: R9_SFP_DP5.1@108.432,-165.357 v1(108.432,-164.023)
  Bottom Layer w0.152: v1(108.432,-164.023) 108.432,-163.337 108.889,-162.88 112.268,-162.88 113.36,-163.972 114.823,-163.972 IC8_SFP_DP5.4@114.829,-163.967
LED_LINK_SFP_DP6: IC8_SFP_DP6.4 R9_SFP_DP6.1 | length 9.1
  Top Layer w0.152: R9_SFP_DP6.1@130.53,-165.357 v1(130.53,-164.023)
  Bottom Layer w0.152: v1(130.53,-164.023) 130.53,-163.337 130.987,-162.88 134.366,-162.88 135.458,-163.972 136.921,-163.972 IC8_SFP_DP6.4@136.927,-163.967
LED_LINK_SFP_DP7: IC8_SFP_DP7.4 R9_SFP_DP7.1 | length 9.1
  Top Layer w0.152: R9_SFP_DP7.1@152.882,-165.357 v1(152.882,-164.023)
  Bottom Layer w0.152: v1(152.882,-164.023) 152.882,-163.337 153.339,-162.88 156.718,-162.88 157.81,-163.972 159.273,-163.972 IC8_SFP_DP7.4@159.279,-163.967
LED_STAT_SFP_DP0: IC8_SFP_DP0.5 R10_SFP_DP0.1 | length 10.4
  Top Layer w0.152: R10_SFP_DP0.1@-16.841,-165.357 v1(-16.841,-164.023)
  Bottom Layer w0.152: v1(-16.841,-164.023) -15.291,-162.474 -11.075,-162.474 -10.237,-163.312 -8.748,-163.312 IC8_SFP_DP0.5@-8.742,-163.317
LED_STAT_SFP_DP1: IC8_SFP_DP1.5 R10_SFP_DP1.1 | length 10.4
  Top Layer w0.152: R10_SFP_DP1.1@5.257,-165.357 v1(5.257,-164.023)
  Bottom Layer w0.152: v1(5.257,-164.023) 6.807,-162.474 11.023,-162.474 11.861,-163.312 13.35,-163.312 IC8_SFP_DP1.5@13.356,-163.317
LED_STAT_SFP_DP2: IC8_SFP_DP2.5 R10_SFP_DP2.1 | length 10.4
  Top Layer w0.152: R10_SFP_DP2.1@40.055,-165.357 v1(40.055,-164.023)
  Bottom Layer w0.152: v1(40.055,-164.023) 41.605,-162.474 45.821,-162.474 46.659,-163.312 48.148,-163.312 IC8_SFP_DP2.5@48.154,-163.317
LED_STAT_SFP_DP3: IC8_SFP_DP3.5 R10_SFP_DP3.1 | length 10.4
  Top Layer w0.152: R10_SFP_DP3.1@62.534,-165.357 v1(62.534,-164.023)
  Bottom Layer w0.152: v1(62.534,-164.023) 64.084,-162.474 68.3,-162.474 69.138,-163.312 70.627,-163.312 IC8_SFP_DP3.5@70.633,-163.317
LED_STAT_SFP_DP4: IC8_SFP_DP4.5 R10_SFP_DP4.1 | length 10.4
  Top Layer w0.152: R10_SFP_DP4.1@84.632,-165.357 v1(84.632,-164.023)
  Bottom Layer w0.152: v1(84.632,-164.023) 86.182,-162.474 90.398,-162.474 91.236,-163.312 92.725,-163.312 IC8_SFP_DP4.5@92.731,-163.317
LED_STAT_SFP_DP5: IC8_SFP_DP5.5 R10_SFP_DP5.1 | length 10.4
  Top Layer w0.152: R10_SFP_DP5.1@106.73,-165.357 v1(106.73,-164.023)
  Bottom Layer w0.152: v1(106.73,-164.023) 108.28,-162.474 112.496,-162.474 113.334,-163.312 114.823,-163.312 IC8_SFP_DP5.5@114.829,-163.317
LED_STAT_SFP_DP6: IC8_SFP_DP6.5 R10_SFP_DP6.1 | length 10.4
  Top Layer w0.152: R10_SFP_DP6.1@128.828,-165.357 v1(128.828,-164.023)
  Bottom Layer w0.152: v1(128.828,-164.023) 130.378,-162.474 134.594,-162.474 135.432,-163.312 136.921,-163.312 IC8_SFP_DP6.5@136.927,-163.317
LED_STAT_SFP_DP7: IC8_SFP_DP7.5 R10_SFP_DP7.1 | length 10.4
  Top Layer w0.152: R10_SFP_DP7.1@151.18,-165.357 v1(151.18,-164.023)
  Bottom Layer w0.152: v1(151.18,-164.023) 152.73,-162.474 156.946,-162.474 157.784,-163.312 159.273,-163.312 IC8_SFP_DP7.5@159.279,-163.317
LOS_SFP_DP0: CN8_SFP_DP0.8 IC8_SFP_DP0.11 RP1_SFP_DP0.5 | length 18
  Top Layer w0.152: v1(-4.395,-160.34) -4.395,-151.044 -3.243,-149.892 CN8_SFP_DP0.8@-3.243,-147.64
  Bottom Layer w0.152: RP1_SFP_DP0.5@-4.636,-159.273 -4.636,-160.098 v1(-4.395,-160.34) -4.395,-162.377 -4.105,-162.667 IC8_SFP_DP0.11@-2.942,-162.667
LOS_SFP_DP1: CN8_SFP_DP1.8 IC8_SFP_DP1.11 RP1_SFP_DP1.5 | length 18
  Top Layer w0.152: v1(17.703,-160.34) 17.703,-151.044 18.855,-149.892 CN8_SFP_DP1.8@18.855,-147.64
  Bottom Layer w0.152: RP1_SFP_DP1.5@17.462,-159.273 17.462,-160.098 v1(17.703,-160.34) 17.703,-162.377 17.993,-162.667 IC8_SFP_DP1.11@19.156,-162.667
LOS_SFP_DP2: CN8_SFP_DP2.8 IC8_SFP_DP2.11 RP1_SFP_DP2.5 | length 18
  Top Layer w0.152: v1(52.501,-160.34) 52.501,-151.044 53.653,-149.892 CN8_SFP_DP2.8@53.653,-147.64
  Bottom Layer w0.152: RP1_SFP_DP2.5@52.26,-159.273 52.26,-160.098 v1(52.501,-160.34) 52.501,-162.377 52.791,-162.667 IC8_SFP_DP2.11@53.954,-162.667
LOS_SFP_DP3: CN8_SFP_DP3.8 IC8_SFP_DP3.11 RP1_SFP_DP3.5 | length 18
  Top Layer w0.152: v1(74.98,-160.34) 74.98,-151.044 76.132,-149.892 CN8_SFP_DP3.8@76.132,-147.64
  Bottom Layer w0.152: RP1_SFP_DP3.5@74.739,-159.273 74.739,-160.098 v1(74.98,-160.34) 74.98,-162.377 75.27,-162.667 IC8_SFP_DP3.11@76.433,-162.667
LOS_SFP_DP4: CN8_SFP_DP4.8 IC8_SFP_DP4.11 RP1_SFP_DP4.5 | length 18
  Top Layer w0.152: v1(97.078,-160.34) 97.078,-151.044 98.23,-149.892 CN8_SFP_DP4.8@98.23,-147.64
  Bottom Layer w0.152: RP1_SFP_DP4.5@96.837,-159.273 96.837,-160.098 v1(97.078,-160.34) 97.078,-162.377 97.368,-162.667 IC8_SFP_DP4.11@98.531,-162.667
LOS_SFP_DP5: CN8_SFP_DP5.8 IC8_SFP_DP5.11 RP1_SFP_DP5.5 | length 18
  Top Layer w0.152: v1(119.176,-160.34) 119.176,-151.044 120.328,-149.892 CN8_SFP_DP5.8@120.328,-147.64
  Bottom Layer w0.152: RP1_SFP_DP5.5@118.935,-159.273 118.935,-160.098 v1(119.176,-160.34) 119.176,-162.377 119.466,-162.667 IC8_SFP_DP5.11@120.629,-162.667
LOS_SFP_DP6: CN8_SFP_DP6.8 IC8_SFP_DP6.11 RP1_SFP_DP6.5 | length 18
  Top Layer w0.152: v1(141.274,-160.34) 141.274,-151.044 142.426,-149.892 CN8_SFP_DP6.8@142.426,-147.64
  Bottom Layer w0.152: RP1_SFP_DP6.5@141.033,-159.273 141.033,-160.098 v1(141.274,-160.34) 141.274,-162.377 141.564,-162.667 IC8_SFP_DP6.11@142.727,-162.667
LOS_SFP_DP7: CN8_SFP_DP7.8 IC8_SFP_DP7.11 RP1_SFP_DP7.5 | length 18
  Top Layer w0.152: v1(163.626,-160.34) 163.626,-151.044 164.778,-149.892 CN8_SFP_DP7.8@164.778,-147.64
  Bottom Layer w0.152: RP1_SFP_DP7.5@163.385,-159.273 163.385,-160.098 v1(163.626,-160.34) 163.626,-162.377 163.916,-162.667 IC8_SFP_DP7.11@165.079,-162.667
NetC46_2: C46.2 CN1.14 | length 13.5
  Bottom Layer w0.152: -21.645,-5.629 -21.645,-3.549 -22.154,-3.04 -22.154,-0.755 -21.722,-0.322 -21.722,0.323 -22.154,0.755 -22.154,1.922 CN1.14@-21.375,2.7
  Bottom Layer w0.254: C46.2@-22.403,-9.578 -21.645,-8.82 -21.645,-5.629 ; CN1.14@-21.375,2.659 CN1.14@-21.375,2.7
NetC48_2: C48.2 CN1.15 | length 11.4
  Bottom Layer w0.152: CN1.15@-21.375,1.1 -21.375,0.001 -20.597,-0.777 -20.597,-3.045 -21.133,-3.581 -21.133,-5.222
  Bottom Layer w0.254: -21.133,-5.222 -21.133,-9.121 C48.2@-20.676,-9.578
NetC73_SFP_DP0_2: C73_SFP_DP0.2 CN8_SFP_DP0.18 IC9_SFP_DP0.2 | length 5.5
  Top Layer w0.254: CN8_SFP_DP0.18@-7.643,-139.44 -7.643,-136.261 v1(-7.643,-135.804) -7.643,-135.382 C73_SFP_DP0.2@-7.316,-135.054
  Bottom Layer w0.254: IC9_SFP_DP0.2@-7.722,-134.875 -7.722,-135.725 v1(-7.643,-135.804)
NetC73_SFP_DP1_2: C73_SFP_DP1.2 CN8_SFP_DP1.18 IC9_SFP_DP1.2 | length 5.5
  Top Layer w0.254: CN8_SFP_DP1.18@14.455,-139.44 14.455,-136.261 v1(14.455,-135.804) 14.455,-135.382 C73_SFP_DP1.2@14.782,-135.054
  Bottom Layer w0.254: IC9_SFP_DP1.2@14.376,-134.875 14.376,-135.725 v1(14.455,-135.804)
NetC73_SFP_DP2_2: C73_SFP_DP2.2 CN8_SFP_DP2.18 IC9_SFP_DP2.2 | length 5.5
  Top Layer w0.254: CN8_SFP_DP2.18@49.253,-139.44 49.253,-136.261 v1(49.253,-135.804) 49.253,-135.382 C73_SFP_DP2.2@49.58,-135.054
  Bottom Layer w0.254: IC9_SFP_DP2.2@49.174,-134.875 49.174,-135.725 v1(49.253,-135.804)
NetC73_SFP_DP3_2: C73_SFP_DP3.2 CN8_SFP_DP3.18 IC9_SFP_DP3.2 | length 5.5
  Top Layer w0.254: CN8_SFP_DP3.18@71.732,-139.44 71.732,-136.261 v1(71.732,-135.804) 71.732,-135.382 C73_SFP_DP3.2@72.059,-135.054
  Bottom Layer w0.254: IC9_SFP_DP3.2@71.653,-134.875 71.653,-135.725 v1(71.732,-135.804)
NetC73_SFP_DP4_2: C73_SFP_DP4.2 CN8_SFP_DP4.18 IC9_SFP_DP4.2 | length 5.5
  Top Layer w0.254: CN8_SFP_DP4.18@93.83,-139.44 93.83,-136.261 v1(93.83,-135.804) 93.83,-135.382 C73_SFP_DP4.2@94.157,-135.054
  Bottom Layer w0.254: IC9_SFP_DP4.2@93.751,-134.875 93.751,-135.725 v1(93.83,-135.804)
NetC73_SFP_DP5_2: C73_SFP_DP5.2 CN8_SFP_DP5.18 IC9_SFP_DP5.2 | length 5.5
  Top Layer w0.254: CN8_SFP_DP5.18@115.928,-139.44 115.928,-136.261 v1(115.928,-135.804) 115.928,-135.382 C73_SFP_DP5.2@116.255,-135.054
  Bottom Layer w0.254: IC9_SFP_DP5.2@115.849,-134.875 115.849,-135.725 v1(115.928,-135.804)
NetC73_SFP_DP6_2: C73_SFP_DP6.2 CN8_SFP_DP6.18 IC9_SFP_DP6.2 | length 5.5
  Top Layer w0.254: CN8_SFP_DP6.18@138.026,-139.44 138.026,-136.261 v1(138.026,-135.804) 138.026,-135.382 C73_SFP_DP6.2@138.353,-135.054
  Bottom Layer w0.254: IC9_SFP_DP6.2@137.947,-134.875 137.947,-135.725 v1(138.026,-135.804)
NetC73_SFP_DP7_2: C73_SFP_DP7.2 CN8_SFP_DP7.18 IC9_SFP_DP7.2 | length 5.5
  Top Layer w0.254: CN8_SFP_DP7.18@160.378,-139.44 160.378,-136.261 v1(160.378,-135.804) 160.378,-135.382 C73_SFP_DP7.2@160.705,-135.054
  Bottom Layer w0.254: IC9_SFP_DP7.2@160.299,-134.875 160.299,-135.725 v1(160.378,-135.804)
NetC74_SFP_DP0_2: C74_SFP_DP0.2 CN8_SFP_DP0.19 IC9_SFP_DP0.3 | length 5.8
  Top Layer w0.254: C74_SFP_DP0.2@-8.89,-135.054 -8.443,-135.501 v1@-8.443,-135.829 ; v1(-8.636,-135.804) -8.611,-135.829 v1@-8.443,-135.829 ; CN8_SFP_DP0.19@-8.443,-139.44 v1@-8.443,-135.829
  Bottom Layer w0.254: IC9_SFP_DP0.3@-8.992,-134.875 -8.992,-135.448 v1(-8.636,-135.804)
NetC74_SFP_DP1_2: C74_SFP_DP1.2 CN8_SFP_DP1.19 IC9_SFP_DP1.3 | length 5.8
  Top Layer w0.254: C74_SFP_DP1.2@13.208,-135.054 13.655,-135.501 v1@13.655,-135.829 ; v1(13.462,-135.804) 13.487,-135.829 v1@13.655,-135.829 ; CN8_SFP_DP1.19@13.655,-139.44 v1@13.655,-135.829
  Bottom Layer w0.254: IC9_SFP_DP1.3@13.106,-134.875 13.106,-135.448 v1(13.462,-135.804)
NetC74_SFP_DP2_2: C74_SFP_DP2.2 CN8_SFP_DP2.19 IC9_SFP_DP2.3 | length 5.8
  Top Layer w0.254: C74_SFP_DP2.2@48.006,-135.054 48.453,-135.501 v1@48.453,-135.829 ; v1(48.26,-135.804) 48.285,-135.829 v1@48.453,-135.829 ; CN8_SFP_DP2.19@48.453,-139.44 v1@48.453,-135.829
  Bottom Layer w0.254: IC9_SFP_DP2.3@47.904,-134.875 47.904,-135.448 v1(48.26,-135.804)
NetC74_SFP_DP3_2: C74_SFP_DP3.2 CN8_SFP_DP3.19 IC9_SFP_DP3.3 | length 5.8
  Top Layer w0.254: C74_SFP_DP3.2@70.485,-135.054 70.932,-135.501 v1@70.932,-135.829 ; v1(70.739,-135.804) 70.764,-135.829 v1@70.932,-135.829 ; CN8_SFP_DP3.19@70.932,-139.44 v1@70.932,-135.829
  Bottom Layer w0.254: IC9_SFP_DP3.3@70.383,-134.875 70.383,-135.448 v1(70.739,-135.804)
NetC74_SFP_DP4_2: C74_SFP_DP4.2 CN8_SFP_DP4.19 IC9_SFP_DP4.3 | length 5.8
  Top Layer w0.254: C74_SFP_DP4.2@92.583,-135.054 93.03,-135.501 v1@93.03,-135.829 ; v1(92.837,-135.804) 92.862,-135.829 v1@93.03,-135.829 ; CN8_SFP_DP4.19@93.03,-139.44 v1@93.03,-135.829
  Bottom Layer w0.254: IC9_SFP_DP4.3@92.481,-134.875 92.481,-135.448 v1(92.837,-135.804)
NetC74_SFP_DP5_2: C74_SFP_DP5.2 CN8_SFP_DP5.19 IC9_SFP_DP5.3 | length 5.8
  Top Layer w0.254: C74_SFP_DP5.2@114.681,-135.054 115.128,-135.501 v1@115.128,-135.829 ; v1(114.935,-135.804) 114.96,-135.829 v1@115.128,-135.829 ; CN8_SFP_DP5.19@115.128,-139.44 v1@115.128,-135.829
  Bottom Layer w0.254: IC9_SFP_DP5.3@114.579,-134.875 114.579,-135.448 v1(114.935,-135.804)
NetC74_SFP_DP6_2: C74_SFP_DP6.2 CN8_SFP_DP6.19 IC9_SFP_DP6.3 | length 5.8
  Top Layer w0.254: C74_SFP_DP6.2@136.779,-135.054 137.226,-135.501 v1@137.226,-135.829 ; v1(137.033,-135.804) 137.058,-135.829 v1@137.226,-135.829 ; CN8_SFP_DP6.19@137.226,-139.44 v1@137.226,-135.829
  Bottom Layer w0.254: IC9_SFP_DP6.3@136.677,-134.875 136.677,-135.448 v1(137.033,-135.804)
NetC74_SFP_DP7_2: C74_SFP_DP7.2 CN8_SFP_DP7.19 IC9_SFP_DP7.3 | length 5.8
  Top Layer w0.254: C74_SFP_DP7.2@159.131,-135.054 159.578,-135.501 v1@159.578,-135.829 ; v1(159.385,-135.804) 159.41,-135.829 v1@159.578,-135.829 ; CN8_SFP_DP7.19@159.578,-139.44 v1@159.578,-135.829
  Bottom Layer w0.254: IC9_SFP_DP7.3@159.029,-134.875 159.029,-135.448 v1(159.385,-135.804)
NetC79_SFP_DP0_2: C79_SFP_DP0.2 C120_SFP_DP0.2 CN8_SFP_DP0.16 L8_SFP_DP0.1 | length 8.4
  Top Layer w0.305: v1(-6.833,-141.061) v1(-6.071,-141.061) -6.043,-141.034 CN8_SFP_DP0.16@-6.043,-139.44
  Bottom Layer w0.406: v1(-6.833,-141.061) -6.833,-141.709 C79_SFP_DP0.2@-6.452,-142.09 -6.452,-141.95 -6.071,-141.569 v1(-6.071,-141.061)
  Bottom Layer w0.762: C120_SFP_DP0.2@-8.127,-140.477 -8.052,-140.552 L8_SFP_DP0.1@-8.052,-142.373 -6.735,-142.373 C79_SFP_DP0.2@-6.452,-142.09
NetC79_SFP_DP1_2: C79_SFP_DP1.2 C120_SFP_DP1.2 CN8_SFP_DP1.16 L8_SFP_DP1.1 | length 8.4
  Top Layer w0.305: v1(15.265,-141.061) v1(16.027,-141.061) 16.055,-141.034 CN8_SFP_DP1.16@16.055,-139.44
  Bottom Layer w0.406: v1(15.265,-141.061) 15.265,-141.709 C79_SFP_DP1.2@15.646,-142.09 15.646,-141.95 16.027,-141.569 v1(16.027,-141.061)
  Bottom Layer w0.762: C120_SFP_DP1.2@13.971,-140.477 14.046,-140.552 L8_SFP_DP1.1@14.046,-142.373 15.363,-142.373 C79_SFP_DP1.2@15.646,-142.09
NetC79_SFP_DP2_2: C79_SFP_DP2.2 C120_SFP_DP2.2 CN8_SFP_DP2.16 L8_SFP_DP2.1 | length 8.4
  Top Layer w0.305: v1(50.063,-141.061) v1(50.825,-141.061) 50.853,-141.034 CN8_SFP_DP2.16@50.853,-139.44
  Bottom Layer w0.406: v1(50.063,-141.061) 50.063,-141.709 C79_SFP_DP2.2@50.444,-142.09 50.444,-141.95 50.825,-141.569 v1(50.825,-141.061)
  Bottom Layer w0.762: C120_SFP_DP2.2@48.769,-140.477 48.844,-140.552 L8_SFP_DP2.1@48.844,-142.373 50.161,-142.373 C79_SFP_DP2.2@50.444,-142.09
NetC79_SFP_DP3_2: C79_SFP_DP3.2 C120_SFP_DP3.2 CN8_SFP_DP3.16 L8_SFP_DP3.1 | length 8.4
  Top Layer w0.305: v1(72.542,-141.061) v1(73.304,-141.061) 73.332,-141.034 CN8_SFP_DP3.16@73.332,-139.44
  Bottom Layer w0.406: v1(72.542,-141.061) 72.542,-141.709 C79_SFP_DP3.2@72.923,-142.09 72.923,-141.95 73.304,-141.569 v1(73.304,-141.061)
  Bottom Layer w0.762: C120_SFP_DP3.2@71.248,-140.477 71.323,-140.552 L8_SFP_DP3.1@71.323,-142.373 72.64,-142.373 C79_SFP_DP3.2@72.923,-142.09
NetC79_SFP_DP4_2: C79_SFP_DP4.2 C120_SFP_DP4.2 CN8_SFP_DP4.16 L8_SFP_DP4.1 | length 8.4
  Top Layer w0.305: v1(94.64,-141.061) v1(95.402,-141.061) 95.43,-141.034 CN8_SFP_DP4.16@95.43,-139.44
  Bottom Layer w0.406: v1(94.64,-141.061) 94.64,-141.709 C79_SFP_DP4.2@95.021,-142.09 95.021,-141.95 95.402,-141.569 v1(95.402,-141.061)
  Bottom Layer w0.762: C120_SFP_DP4.2@93.346,-140.477 93.421,-140.552 L8_SFP_DP4.1@93.421,-142.373 94.738,-142.373 C79_SFP_DP4.2@95.021,-142.09
NetC79_SFP_DP5_2: C79_SFP_DP5.2 C120_SFP_DP5.2 CN8_SFP_DP5.16 L8_SFP_DP5.1 | length 8.4
  Top Layer w0.305: v1(116.738,-141.061) v1(117.5,-141.061) 117.528,-141.034 CN8_SFP_DP5.16@117.528,-139.44
  Bottom Layer w0.406: v1(116.738,-141.061) 116.738,-141.709 C79_SFP_DP5.2@117.119,-142.09 117.119,-141.95 117.5,-141.569 v1(117.5,-141.061)
  Bottom Layer w0.762: C120_SFP_DP5.2@115.444,-140.477 115.519,-140.552 L8_SFP_DP5.1@115.519,-142.373 116.836,-142.373 C79_SFP_DP5.2@117.119,-142.09
NetC79_SFP_DP6_2: C79_SFP_DP6.2 C120_SFP_DP6.2 CN8_SFP_DP6.16 L8_SFP_DP6.1 | length 8.4
  Top Layer w0.305: v1(138.836,-141.061) v1(139.598,-141.061) 139.626,-141.034 CN8_SFP_DP6.16@139.626,-139.44
  Bottom Layer w0.406: v1(138.836,-141.061) 138.836,-141.709 C79_SFP_DP6.2@139.217,-142.09 139.217,-141.95 139.598,-141.569 v1(139.598,-141.061)
  Bottom Layer w0.762: C120_SFP_DP6.2@137.542,-140.477 137.617,-140.552 L8_SFP_DP6.1@137.617,-142.373 138.934,-142.373 C79_SFP_DP6.2@139.217,-142.09
NetC79_SFP_DP7_2: C79_SFP_DP7.2 C120_SFP_DP7.2 CN8_SFP_DP7.16 L8_SFP_DP7.1 | length 8.4
  Top Layer w0.305: v1(161.188,-141.061) v1(161.95,-141.061) 161.978,-141.034 CN8_SFP_DP7.16@161.978,-139.44
  Bottom Layer w0.406: v1(161.188,-141.061) 161.188,-141.709 C79_SFP_DP7.2@161.569,-142.09 161.569,-141.95 161.95,-141.569 v1(161.95,-141.061)
  Bottom Layer w0.762: C120_SFP_DP7.2@159.894,-140.477 159.969,-140.552 L8_SFP_DP7.1@159.969,-142.373 161.286,-142.373 C79_SFP_DP7.2@161.569,-142.09
NetC84_1: C84.1 IC11.1 | length 3.5
  Top Layer w0.406: IC11.1@49.502,-51.663 50.606,-51.663 51.13,-52.187 51.13,-53.851 C84.1@51.104,-53.876
NetC84_2: C84.2 D1.2 IC11.8 L1.1 | length 4.7
  Top Layer w0.406: 48.387,-57.953 50.292,-57.953 51.104,-57.14 C84.2@51.104,-55.476
NetC91_2: C91.2 IC11.5 R5.2 | length 4.8
  Top Layer w0.254: IC11.5@44.602,-47.853 44.704,-47.751 v1(44.704,-46.827)
  Bottom Layer w0.152: C91.2@43.903,-43.449 43.878,-43.475 R5.2@43.878,-45.1 44.704,-45.926 v1(44.704,-46.827)
NetC117_SFP_DP0_1: C117_SFP_DP0.1 C118_SFP_DP0.1 CN8_SFP_DP0.15 L9_SFP_DP0.1 | length 11.2
  Top Layer w0.305: CN8_SFP_DP0.15@-5.243,-139.44 -5.243,-141 v1(-5.182,-141.061) v1(-4.42,-141.061)
  Bottom Layer w0.406: v1(-5.182,-141.061) -5.182,-141.735 C118_SFP_DP0.1@-4.852,-142.065 -4.42,-141.633 v1(-4.42,-141.061)
  Bottom Layer w0.762: C118_SFP_DP0.1@-4.852,-142.065 -4.485,-142.065 -2.899,-142.065 -2.887,-142.077 ; C117_SFP_DP0.1@-3.38,-140.96 -2.887,-141.453 -2.887,-142.077 ; L9_SFP_DP0.1@-2.887,-145.303 -2.887,-142.077
NetC117_SFP_DP1_1: C117_SFP_DP1.1 C118_SFP_DP1.1 CN8_SFP_DP1.15 L9_SFP_DP1.1 | length 11.2
  Top Layer w0.305: CN8_SFP_DP1.15@16.855,-139.44 16.855,-141 v1(16.916,-141.061) v1(17.678,-141.061)
  Bottom Layer w0.406: v1(16.916,-141.061) 16.916,-141.735 C118_SFP_DP1.1@17.246,-142.065 17.678,-141.633 v1(17.678,-141.061)
  Bottom Layer w0.762: C118_SFP_DP1.1@17.246,-142.065 17.613,-142.065 19.199,-142.065 19.211,-142.077 ; C117_SFP_DP1.1@18.718,-140.96 19.211,-141.453 19.211,-142.077 ; L9_SFP_DP1.1@19.211,-145.303 19.211,-142.077
NetC117_SFP_DP2_1: C117_SFP_DP2.1 C118_SFP_DP2.1 CN8_SFP_DP2.15 L9_SFP_DP2.1 | length 11.2
  Top Layer w0.305: CN8_SFP_DP2.15@51.653,-139.44 51.653,-141 v1(51.714,-141.061) v1(52.476,-141.061)
  Bottom Layer w0.406: v1(51.714,-141.061) 51.714,-141.735 C118_SFP_DP2.1@52.044,-142.065 52.476,-141.633 v1(52.476,-141.061)
  Bottom Layer w0.762: C118_SFP_DP2.1@52.044,-142.065 52.411,-142.065 53.997,-142.065 54.009,-142.077 ; C117_SFP_DP2.1@53.516,-140.96 54.009,-141.453 54.009,-142.077 ; L9_SFP_DP2.1@54.009,-145.303 54.009,-142.077
NetC117_SFP_DP3_1: C117_SFP_DP3.1 C118_SFP_DP3.1 CN8_SFP_DP3.15 L9_SFP_DP3.1 | length 11.2
  Top Layer w0.305: CN8_SFP_DP3.15@74.132,-139.44 74.132,-141 v1(74.193,-141.061) v1(74.955,-141.061)
  Bottom Layer w0.406: v1(74.193,-141.061) 74.193,-141.735 C118_SFP_DP3.1@74.523,-142.065 74.955,-141.633 v1(74.955,-141.061)
  Bottom Layer w0.762: C118_SFP_DP3.1@74.523,-142.065 74.89,-142.065 76.476,-142.065 76.488,-142.077 ; C117_SFP_DP3.1@75.995,-140.96 76.488,-141.453 76.488,-142.077 ; L9_SFP_DP3.1@76.488,-145.303 76.488,-142.077
NetC117_SFP_DP4_1: C117_SFP_DP4.1 C118_SFP_DP4.1 CN8_SFP_DP4.15 L9_SFP_DP4.1 | length 11.2
  Top Layer w0.305: CN8_SFP_DP4.15@96.23,-139.44 96.23,-141 v1(96.291,-141.061) v1(97.053,-141.061)
  Bottom Layer w0.406: v1(96.291,-141.061) 96.291,-141.735 C118_SFP_DP4.1@96.621,-142.065 97.053,-141.633 v1(97.053,-141.061)
  Bottom Layer w0.762: C118_SFP_DP4.1@96.621,-142.065 96.988,-142.065 98.574,-142.065 98.586,-142.077 ; C117_SFP_DP4.1@98.093,-140.96 98.586,-141.453 98.586,-142.077 ; L9_SFP_DP4.1@98.586,-145.303 98.586,-142.077
NetC117_SFP_DP5_1: C117_SFP_DP5.1 C118_SFP_DP5.1 CN8_SFP_DP5.15 L9_SFP_DP5.1 | length 11.2
  Top Layer w0.305: CN8_SFP_DP5.15@118.328,-139.44 118.328,-141 v1(118.389,-141.061) v1(119.151,-141.061)
  Bottom Layer w0.406: v1(118.389,-141.061) 118.389,-141.735 C118_SFP_DP5.1@118.719,-142.065 119.151,-141.633 v1(119.151,-141.061)
  Bottom Layer w0.762: C118_SFP_DP5.1@118.719,-142.065 119.086,-142.065 120.672,-142.065 120.684,-142.077 ; C117_SFP_DP5.1@120.191,-140.96 120.684,-141.453 120.684,-142.077 ; L9_SFP_DP5.1@120.684,-145.303 120.684,-142.077
NetC117_SFP_DP6_1: C117_SFP_DP6.1 C118_SFP_DP6.1 CN8_SFP_DP6.15 L9_SFP_DP6.1 | length 11.2
  Top Layer w0.305: CN8_SFP_DP6.15@140.426,-139.44 140.426,-141 v1(140.487,-141.061) v1(141.249,-141.061)
  Bottom Layer w0.406: v1(140.487,-141.061) 140.487,-141.735 C118_SFP_DP6.1@140.817,-142.065 141.249,-141.633 v1(141.249,-141.061)
  Bottom Layer w0.762: C118_SFP_DP6.1@140.817,-142.065 141.184,-142.065 142.77,-142.065 142.782,-142.077 ; C117_SFP_DP6.1@142.289,-140.96 142.782,-141.453 142.782,-142.077 ; L9_SFP_DP6.1@142.782,-145.303 142.782,-142.077
NetC117_SFP_DP7_1: C117_SFP_DP7.1 C118_SFP_DP7.1 CN8_SFP_DP7.15 L9_SFP_DP7.1 | length 11.2
  Top Layer w0.305: CN8_SFP_DP7.15@162.778,-139.44 162.778,-141 v1(162.839,-141.061) v1(163.601,-141.061)
  Bottom Layer w0.406: v1(162.839,-141.061) 162.839,-141.735 C118_SFP_DP7.1@163.169,-142.065 163.601,-141.633 v1(163.601,-141.061)
  Bottom Layer w0.762: C118_SFP_DP7.1@163.169,-142.065 163.536,-142.065 165.122,-142.065 165.134,-142.077 ; C117_SFP_DP7.1@164.641,-140.96 165.134,-141.453 165.134,-142.077 ; L9_SFP_DP7.1@165.134,-145.303 165.134,-142.077
NetCN8_SFP_DP0_7: CN8_SFP_DP0.7 R70_SFP_DP0.2 R71_SFP_DP0.2 | length 5.5
  Top Layer w0.152: v1@-4.043,-149.312 CN8_SFP_DP0.7@-4.043,-147.64
  Bottom Layer w0.152: v1(-4.039,-149.291) -2.401,-150.929 R71_SFP_DP0.2@-2.401,-152.466
NetCN8_SFP_DP1_7: CN8_SFP_DP1.7 R70_SFP_DP1.2 R71_SFP_DP1.2 | length 5.5
  Top Layer w0.152: v1@18.055,-149.312 CN8_SFP_DP1.7@18.055,-147.64
  Bottom Layer w0.152: v1(18.059,-149.291) 19.697,-150.929 R71_SFP_DP1.2@19.697,-152.466
NetCN8_SFP_DP2_7: CN8_SFP_DP2.7 R70_SFP_DP2.2 R71_SFP_DP2.2 | length 5.5
  Top Layer w0.152: v1@52.853,-149.312 CN8_SFP_DP2.7@52.853,-147.64
  Bottom Layer w0.152: v1(52.857,-149.291) 54.495,-150.929 R71_SFP_DP2.2@54.495,-152.466
NetCN8_SFP_DP3_7: CN8_SFP_DP3.7 R70_SFP_DP3.2 R71_SFP_DP3.2 | length 5.5
  Top Layer w0.152: v1@75.332,-149.312 CN8_SFP_DP3.7@75.332,-147.64
  Bottom Layer w0.152: v1(75.336,-149.291) 76.974,-150.929 R71_SFP_DP3.2@76.974,-152.466
NetCN8_SFP_DP4_7: CN8_SFP_DP4.7 R70_SFP_DP4.2 R71_SFP_DP4.2 | length 5.5
  Top Layer w0.152: v1@97.43,-149.312 CN8_SFP_DP4.7@97.43,-147.64
  Bottom Layer w0.152: v1(97.434,-149.291) 99.072,-150.929 R71_SFP_DP4.2@99.072,-152.466
NetCN8_SFP_DP5_7: CN8_SFP_DP5.7 R70_SFP_DP5.2 R71_SFP_DP5.2 | length 5.5
  Top Layer w0.152: v1@119.528,-149.312 CN8_SFP_DP5.7@119.528,-147.64
  Bottom Layer w0.152: v1(119.532,-149.291) 121.17,-150.929 R71_SFP_DP5.2@121.17,-152.466
NetCN8_SFP_DP6_7: CN8_SFP_DP6.7 R70_SFP_DP6.2 R71_SFP_DP6.2 | length 5.5
  Top Layer w0.152: v1@141.626,-149.312 CN8_SFP_DP6.7@141.626,-147.64
  Bottom Layer w0.152: v1(141.63,-149.291) 143.268,-150.929 R71_SFP_DP6.2@143.268,-152.466
NetCN8_SFP_DP7_7: CN8_SFP_DP7.7 R70_SFP_DP7.2 R71_SFP_DP7.2 | length 5.5
  Top Layer w0.152: v1@163.978,-149.312 CN8_SFP_DP7.7@163.978,-147.64
  Bottom Layer w0.152: v1(163.982,-149.291) 165.62,-150.929 R71_SFP_DP7.2@165.62,-152.466
NetIC11_4: IC11.4 R76.1 R77.2 | length 4.5
  Top Layer w0.305: R77.2@49.796,-46.294 R77.2@49.796,-46.091 49.86,-46.154 49.86,-47.92 49.793,-47.853 IC11.4@49.502,-47.853 51.488,-47.853 R76.1@51.562,-47.78
NetLD1_SFP_DP0_2: LD1_SFP_DP0.2 R9_SFP_DP0.2 | length 9.7
  Top Layer w0.152: LD1_SFP_DP0.2@-16.815,-175.631 -14.707,-173.523 -14.707,-168.493 -15.139,-168.062 R9_SFP_DP0.2@-15.139,-166.957